# Altium PCB bridge4.PcbDoc
Units mil, origin at the board's own origin, x right, y up, seen from the top; angles counter-clockwise.
Board outline 931.47 x 1240.05 mil, 4 copper layers (Top Layer, Internal Plane 1, Internal Plane 2, Bottom Layer), stack 29.834 mil thick; 19 components, 64 nets, 62 pads, 202 vias.
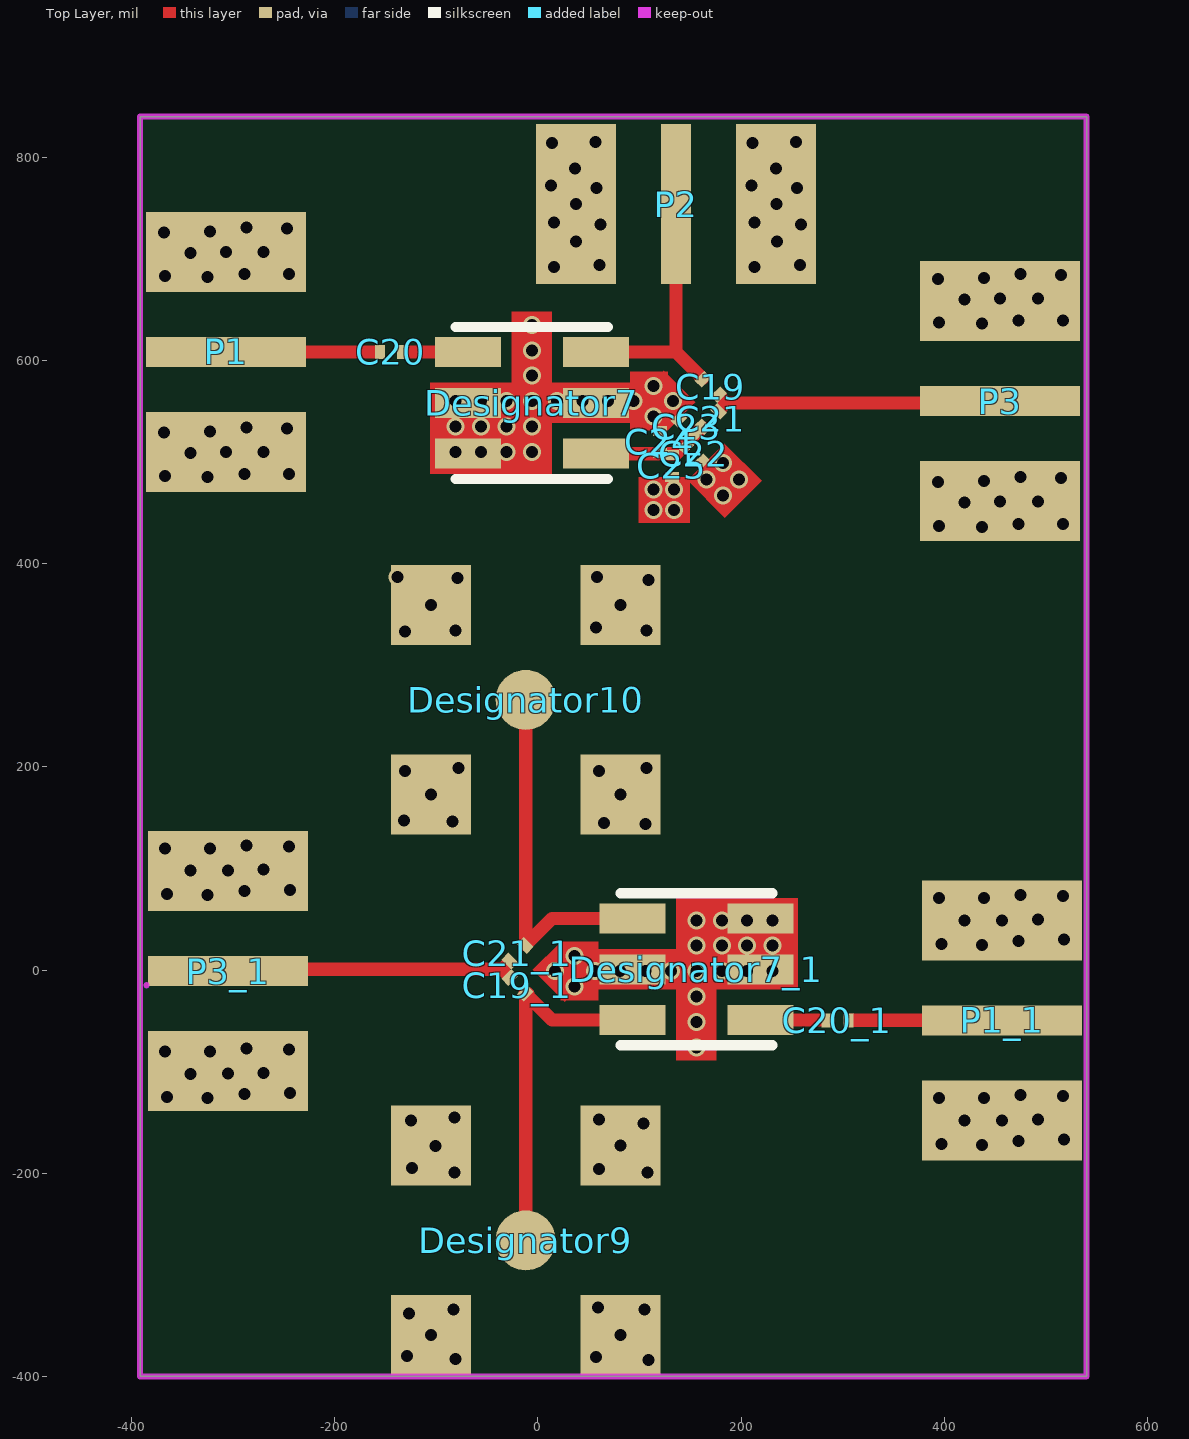
[diagram p0: Top Layer view]
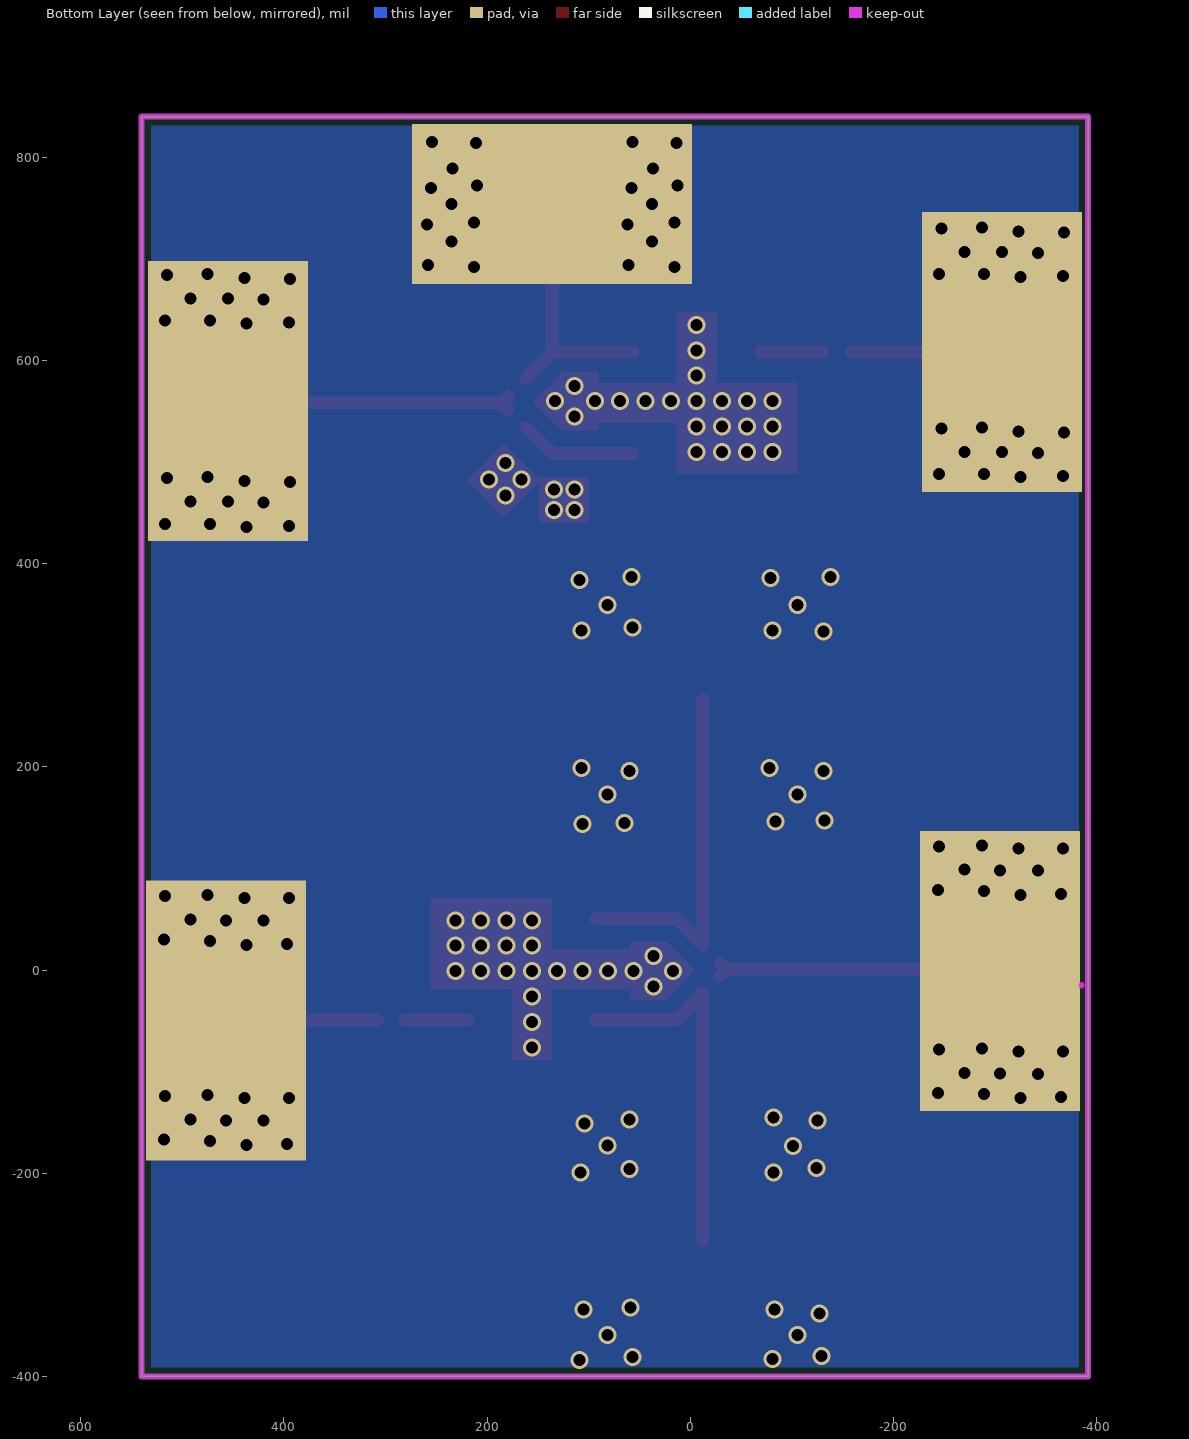
[diagram p1: Bottom Layer view, seen from below]
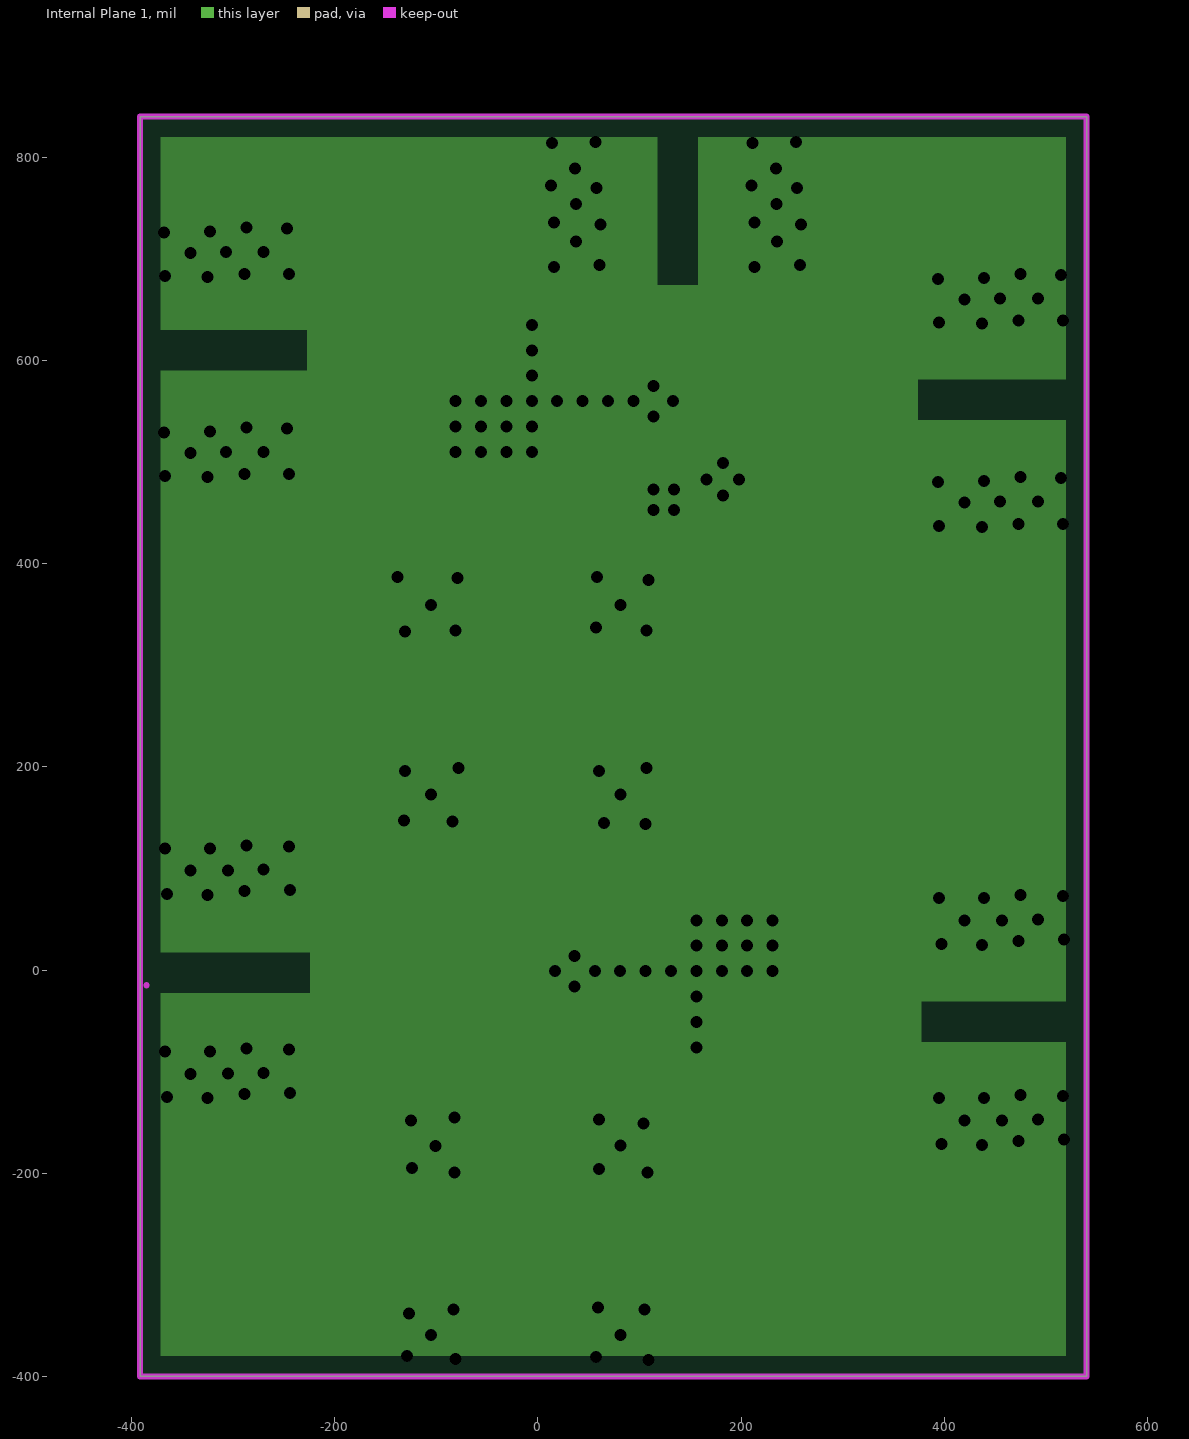
[diagram p2: Internal Plane 1, clearances drawn from the general rule]
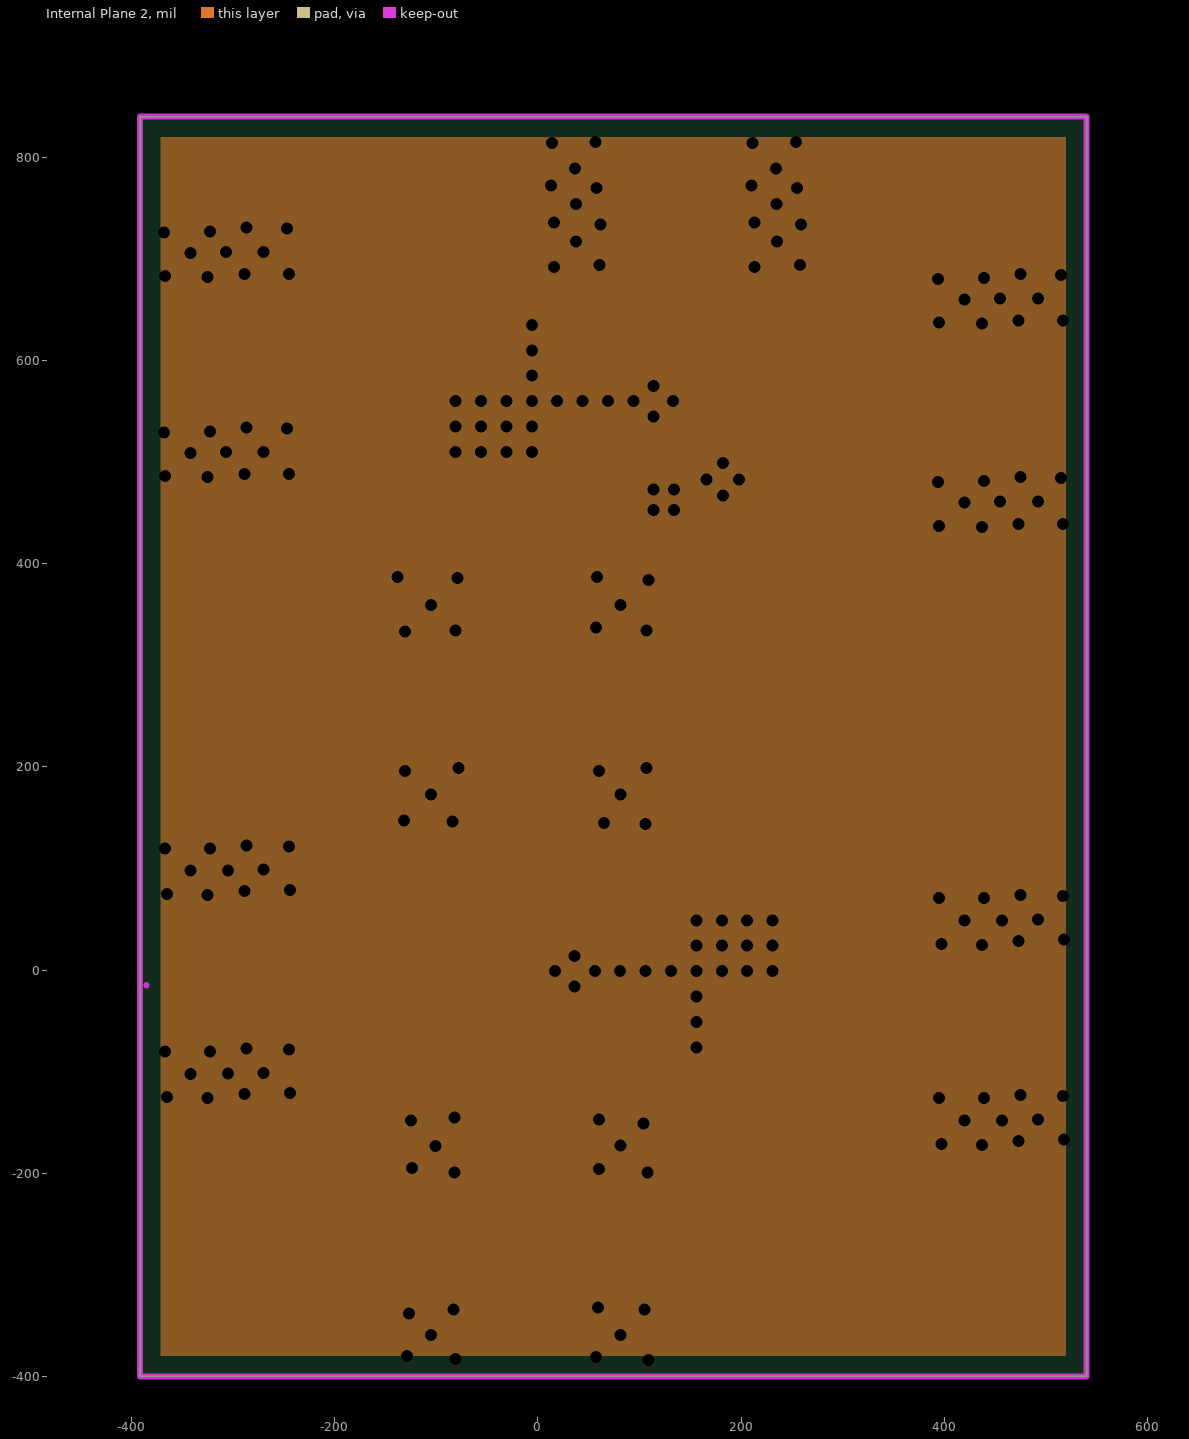
[diagram p3: Internal Plane 2, clearances drawn from the general rule]

## Layer stack, top to bottom
Top Solder: solder mask 0.4, Solder Resist, Dk 3.8
Top Layer: signal copper 1.4
Dielectric 1: prepreg 7.1, Dk 4.6
Internal Plane 1: plane copper 1.417, net GND
Dielectric 3: core 10, Dk 4.6
Internal Plane 2: plane copper 1.417, net GND
Dielectric 4: prepreg 7.1, Dk 4.6
Bottom Layer: signal copper 1.4
Bottom Solder: solder mask 0.4, Solder Resist, Dk 3.8

## Board outline
-391.47,-400 -391.47,840.05 540,840.05 540,-400

## Design rules (kind name [scope] priority, off if disabled: settings)
Clearance [All] p1: gap=6 ignorepadtopadclearanceinfootprint=FALSE except(0: Arc-Hole Track-Hole SMDPad-Hole THPad-Hole Via-Hole Fill-Hole Poly-Hole Region-Hole Text-Hole)
DiffPairsRouting [All] p1: maxlimit=10 minlimit=10 mostfreqgap=10 toplayer_minwidth=5.98 toplayer_maxwidth=15 toplayer_prefwidth=15 bottomlayer_minwidth=5.98 bottomlayer_maxwidth=15 bottomlayer_prefwidth=15 maxuncoupledlength=500
MinimumSolderMaskSliver [All] p1 off: minsoldermaskwidth=10
PlaneClearance [All] p1: clearance=10
PlaneConnect [All] p1: planeconnectstyle=Direct reliefexpansion=20 reliefentries=4 reliefconductorwidth=10 reliefairgap=10
PolygonConnect [All] p1: connectstyle=Direct reliefconductorwidth=10 reliefentries=4 polygonreliefangle="90 Angle" airgapwidth=10
RoomDefinition mixer [InComponentClass('mixer')] p1 off: confinementstyle=ConfineIn formatcopy=TRUE lockcomponents=FALSE outline 1577.53,1274.78 7046.53,1274.78 7046.53,1669.78 1577.53,1669.78
RoomDefinition power [InComponentClass('power')] p2 off: confinementstyle=ConfineIn formatcopy=TRUE lockcomponents=FALSE outline 1573.53,-372.22 3918.53,-372.22 3918.53,-132.22 1573.53,-132.22
RoutingVias [All] p1: holewidth=12 width=20 viastyle="Through Hole" minholewidth=11.81 minwidth=19.68 maxholewidth=28 maxwidth=50
SilkToBoardRegionClearance [All] p1 off:
SilkToSilkClearance [All] p1 off: silktosilkclearance=10
SilkToSolderMaskClearance [IsPad] p1 off: minsilkscreentomaskgap=10 clearancetoexposedcopper=TRUE
SolderMaskExpansion [All] p1: expansion=4
Width [All] p1: maxlimit=60 minlimit=6 preferedwidth=6
23 further rules are at their usual default settings.

## Classes and differential pairs
component class mixer: R28
differential pair IF2: +IF2_P -IF2_N
differential pair IF1: +IF1_P -IF1_N

## Components (designator, comment, footprint, x,y, rotation, side; value= is the part's Value field where it differs from the comment)
C19 "0.1uF" 0201 170.18,573.98 r135 top
C19_1 "0.1uF" 0201 -20.18,-14.98 r315 top (schematic designator C19)
C20 "0.1uF" 0201 -144.78,608.43 r180 top (schematic designator C19)
C20_1 "0.1uF" 0201 294.78,-49.43 r0 top (schematic designator C19)
C21 "0.1uF" 0201 170.18,542.48 r45 top (schematic designator C19)
C21_1 "0.1uF" 0201 -20.18,16.52 r225 top (schematic designator C19)
C22 "0.1uF" 0201 153.45,508.03 r315 top (schematic designator C19)
C23 "0.1uF" 0201 146.56,534.61 r315 top (schematic designator C19)
C24 "0.1uF" 0201 119.98,519.84 r270 top (schematic designator C19)
C25 "0.1uF" 0201 131.8,496.22 r270 top (schematic designator C19)
Designator7 "Comment" TCM1-63AX+ -6,558.23 r270 top
Designator7_1 "Comment" TCM1-63AX+ 156,0.77 r90 top
Designator9 "Comment" SMA-SMT -12,-266 r0 top
Designator10 "Comment" SMA-SMT -12,266 r0 top
P1 "Comment" SMA-3B -307,510 r90 top
P1_1 "Comment" SMA-3B 457,49 r270 top
P2 "Comment" SMA-3B 37.57,754 r0 top
P3 "Comment" SMA-3B 455,461.57 r90 top
P3_1 "Comment" SMA-3B -305,97.43 r270 top

## Footprints (in the part's own frame and the unit in brackets; to place one, negate y for a bottom-side part, rotate by r counter-clockwise, add the part's x,y. Pads: shape width x height; smd on the part's side, far side on the other; paste and mask are expansions set on the pad)
0201 [mm]
  rect 0.25x0.35 smd: 1(-0.275,0) 2(0.275,0)
SMA-3B [mm]
  rect 0.75x4 smd: 1(2.5,0)
  rect 2x4 smd: GND(0,0) GND(5,0)
  rect 7x4 smd far side: GND(2.5,0)
  Top Layer pour cut-out: 1,2 4,2 4,-2 1,-2
SMA-SMT [mm]
  round 1.5 smd: 1(0,0)
  rect 2x2 smd: GND(-2.37,-2.37) GND(-2.37,2.37) GND(2.37,-2.37) GND(2.37,2.37)
TCM1-63AX+ [mm]
  rect 0.75x1.65 smd: 1(-1.27,1.6) 2(0,1.6) 2(0,-1.6) 2(1.27,-1.6) 3(1.27,1.6) 5(-1.27,-1.6)
  Top Layer region: -0.508,0.254 0.508,0.254 0.508,2.54 -0.508,2.54
  Top Layer region: -2.286,-0.508 1.778,-0.508 1.778,0.508 -2.286,0.508
  Top Layer region: -0.508,-2.54 1.778,-2.54 1.778,-0.254 -0.508,-0.254
  silkscreen extent -1.9,-1.9 1.9,1.9

## Part data
C19 C19_1 C20 C20_1 C21 C21_1 C22 C23 C24 C25: library part CAP0402-CAP, "<b>Capacitor</b> / Standard 0603 ceramic capacitor, and 0.1\" leaded capacitor.", PARTNO=CC0402ZRY5V7BB104

## Via types
v1: diameter 17.72, hole 11.81, Top Layer to Bottom Layer, 202 vias

## Nets (pads, with @x,y where several pads share a name; then routed paths per layer and width w, separated by ;. In a path a pad name is that pad's centre, name@x,y a point inside that pad or via, vN(x,y) a via of type N, cw(c..) or ccw(c..) an arc to the next point about the centre after c; other vN are vias at no path point)
5V: 
5V-MIXER: 
5VA: 
5VB: 
6V: 
-3.3V: 
DETO: 
GND: C22.2 C23.1 Designator7.2 Designator9.GND Designator10.GND P1.GND@-307,510 P1.GND@-307,608.43 P1_1.GND@457,-49.43 P2.GND@136,754 P2.GND@234.43,754 P3.GND P3_1.GND@-305,-1
  other v1: 109,-384 -81,-383 57,-381 -129,-380 -105.31,-359.31 81.31,-359.31 -127,-338 -83,-334 105,-334 59,-332 -82,-199 108,-199 60,-196 -124,-195 -101,-173 81.31,-172.69 437,-172 397,-171 473,-168 518,-167 104,-151 -125,-148 420,-148 457,-147.85 60,-147 492,-147 -82,-145 -325,-126.15 395,-126 439,-126 -365,-125.15 517,-124 475,-123 -289,-122.15 -244,-121.15 -342,-102.15 -305,-102 -270,-101.15 -367,-80.15 -323,-80.15 -245,-78.15 -287,-77.15 156,-76 156,-51 156,-26 36,-16 17,-1 56,-1 81,-1 106,-1 131,-1 156,-1 181,-1 206,-1 231,-1 36,14 156,24 181,24 206,24 231,24 437,24.85 397,25.85 473,28.85 518,29.85 156,49 181,49 206,49 231,49 420,48.85 457,49 492,49.85 395,70.85 439,70.85 517,72.85 -325,73.85 475,73.85 -365,74.85 -289,77.85 -244,78.85 -342,97.85 -305,98 -270,98.85 -367,119.85 -323,119.85 -245,121.85 -287,122.85 106,144 65,145 -84,146 -132,147 -105.31,172.69 81.31,172.69 -131,196 60,196 -78,199 107,199 -131,333 -81,334 107,334 57,337 -105.31,359.31 81.31,359.31 109,384 -79,386 -138,387 58,387 437,436.15 395,437.15 473,439.15 517,439.15 114,453 134,453 420,460.15 455,461 492,461.15 182,467 114,473 134,473 394,480.15 439,481.15 166,483 198,483 515,484.15 -325,485.15 475,485.15 -367,486.15 -289,488.15 -245,488.15 182,499 -342,509.15 -307,510 -270,510.15 -81,510 -56,510 -31,510 -6,510 -368,529.15 -323,530.15 -247,533.15 -287,534.15 -81,535 -56,535 -31,535 -6,535 114,545 -81,560 -56,560 -31,560 -6,560 19,560 44,560 69,560 94,560 133,560 114,575 -6,585 -6,610 -6,635 437,636.15 395,637.15 473,639.15 517,639.15 420,660.15 455,661 492,661.15 394,680.15 439,681.15 -325,682 -367,683 515,684.15 -289,685 -245,685 475,685.15 15.72,692 213.15,692 60.72,694 258.15,694 -342,706 -307,706.85 -270,707 37.72,717 235.15,717 -368,726 -323,727 -247,730 -287,731 61.72,734 259.15,734 15.72,736 213.15,736 37.57,754 235,754 57.72,770 255.15,770 12.72,772 210.15,772 36.72,789 234.15,789 13.72,814 211.15,814 56.72,815 254.15,815
IF1_N: 
IF1_P: 
IF2_N: 
IF2_P: 
IF3+: 
IF3-: 
NetAnt1_1: 
NetAnt2_1: 
NetC1_1: 
NetC1_2: 
NetC2_1: 
NetC4_1: 
NetC7_2: 
NetC11_2: 
NetC15_2: 
NetC18_2: 
NetC24_2: 
NetC28_1: 
NetC28_2: 
NetC29_1: 
NetC30_1: 
NetC30_2: 
NetC31_1: 
NetC31_2: 
NetC43_2: 
NetC44_1: 
NetC44_2: 
NetC45_2: 
NetC46_1: 
NetC46_2: 
NetC47_2: 
NetC48_2: 
NetC49_1: 
NetC49_2: 
NetC50_1: 
NetC50_2: 
NetC51_2: 
NetC53_2: 
NetC57_1: 
NetC57_2: 
NetC58_1: 
NetC58_2: 
NetC59_1: 
NetC59_2: 
NetC60_1: 
NetC60_2: 
NetC64_2: 
NetC66_2: 
NetR2_1: 
NetR4_1: 
NetR5_1: 
NetR10_1: 
NetR15_1: 
NetR24_1: 
VSET: 
VSYS: 
pads on no net: C19.1 C19.2 C19_1.1 C19_1.2 C20.1 C20.2 C20_1.1 C20_1.2 C21.1 C21.2 C21_1.1 C21_1.2 C22.1 C23.2 C24.1 C24.2 C25.1 C25.2 Designator7.1 Designator7.3 Designator7.5 Designator7_1.1 Designator7_1.2 Designator7_1.3 Designator7_1.5 Designator9.1 Designator10.1 P1.1 P1.GND@-307,706.85 P1_1.1 P1_1.GND@457,49 P1_1.GND@457,-147.85 P2.1 P2.GND@37.57,754 P3.1 P3_1.1 P3_1.GND@-305,97.43 P3_1.GND@-305,-99.43
copper on no net: | length 1958.8
  Top Layer w12: -29.04,-6.12 -35.93,0.77 -29.04,7.66 ; 179.04,551.34 185.93,558.23 179.04,565.12
  Top Layer w13: -305,0.77 -35.93,0.77 ; -260.02,608.43 -158.2,608.43 ; -130.49,608.23 -68.99,608.23 ; -12.53,-22.63 -12,-22.63 -12,-266 ; -12,266 -12,24.89 -11.81,24.89 14.07,50.77 93.01,50.77 ; -10,-23.34 -11.81,-23.34 14.07,-49.23 93.01,-49.23 ; 56.99,508.23 135.93,508.23 161.81,534.11 ; 56.99,608.23 135.93,608.23 ; 135.93,714.05 135.93,608.23 ; 161.81,582.34 135.93,608.23 ; 185.93,558.23 455,558.23 ; 218.99,-49.23 280.49,-49.23 ; 308.2,-49.43 410.02,-49.43

## Polygon pours and split planes (outlines as drawn)
GND on Bottom Layer "GND_L04_P000" (solid, remove dead copper, pour order 0): -391.47,840.05 1326.8,840.05 1326.8,-436.95 1251.8,-511.95 -422.2,-511.95
GND on Internal Plane 1 (split plane): 519.9,581.14 374.43,581.14 374.43,541.77 519.9,541.77 519.9,-31.2 377.57,-31.2 377.57,-70.57 519.9,-70.57 519.9,-379.9 -371.38,-379.9 -371.38,-22.14 -224.43,-22.14 -224.43,17.23 -371.38,17.23 -371.38,590.2 -227.57,590.2 -227.57,629.57 -371.38,629.57 -371.38,819.95 117.77,819.95 117.77,674.57 157.14,674.57 157.14,819.95 519.9,819.95
GND on Internal Plane 2 (split plane): 519.9,-379.9 -371.38,-379.9 -371.38,819.95 519.9,819.95

## Keep-outs
Keep-Out Layer:
  lines w6: -385.2,-14.95 -385.2,-14.76 ; -391.47,-400 -391.47,840.05 540,840.05 540,-397 540,-400 -391.47,-400

## Other copper
Top Layer:
  region net GND: 220.5,481.5 183.55,518.45 147.05,481.95 184,445
  region net GND: 149.51,440 149.51,485.39 99,485.39 99,440
  region net GND: 128.2,531.56 155.32,558.68 123.61,590.39 96.49,563.28
  rectangle net GND: 90.46,531 127.86,589
  region: 59.54,28 22.14,28 22.14,-30 59.54,-30
  region: 21.8,27.44 -5.32,0.32 26.39,-31.39 53.51,-4.28
Internal Plane 1 (plane layer: these items are gaps in the copper):
  region: -227.57,629.57 -387.57,629.57 -387.57,590.2 -227.57,590.2
  region: 157.14,674.57 157.14,834.57 117.77,834.57 117.77,674.57
  region: 534.43,581.14 374.43,581.14 374.43,541.77 534.43,541.77
  rectangle: -384.43,-22.14 -224.43,17.23
  rectangle: 377.57,-70.57 537.57,-31.2

## Silkscreen, mask and mechanical layers (free items; w line width, h text height)
Top Solder:
  rectangle: 933.8,934.05 1306.8,1131.05
  rectangle: -396.2,931.05 -18.2,1109.05
  rectangle: 418.57,1079.24 497.23,1190.57
  rectangle: 418.57,1289 497.31,1393.88
  region: 934.31,1532.11 1304.39,1532.11 1304.39,1052.78 934.31,1052.78 934.31,1227.04 1048.49,1227.04 1048.49,1258.54 934.31,1258.54
  region: -18.44,1062.62 -388.52,1062.62 -388.52,1529.16 -18.44,1529.16 -18.44,1255.54 -132.61,1255.54 -132.61,1224.04 -18.44,1224.04